# Altium PCB AVR Board 4.0 R1.PcbDoc (part 1 of 2)
Units mil, origin at the board's own origin, x right, y up, seen from the top; angles counter-clockwise.
Board outline 5050 x 3125 mil, 2 copper layers (Top Layer, Bottom Layer); 127 components, 141 nets, 588 pads, 126 vias.
Unrouted connection lines stored in the file: 1.
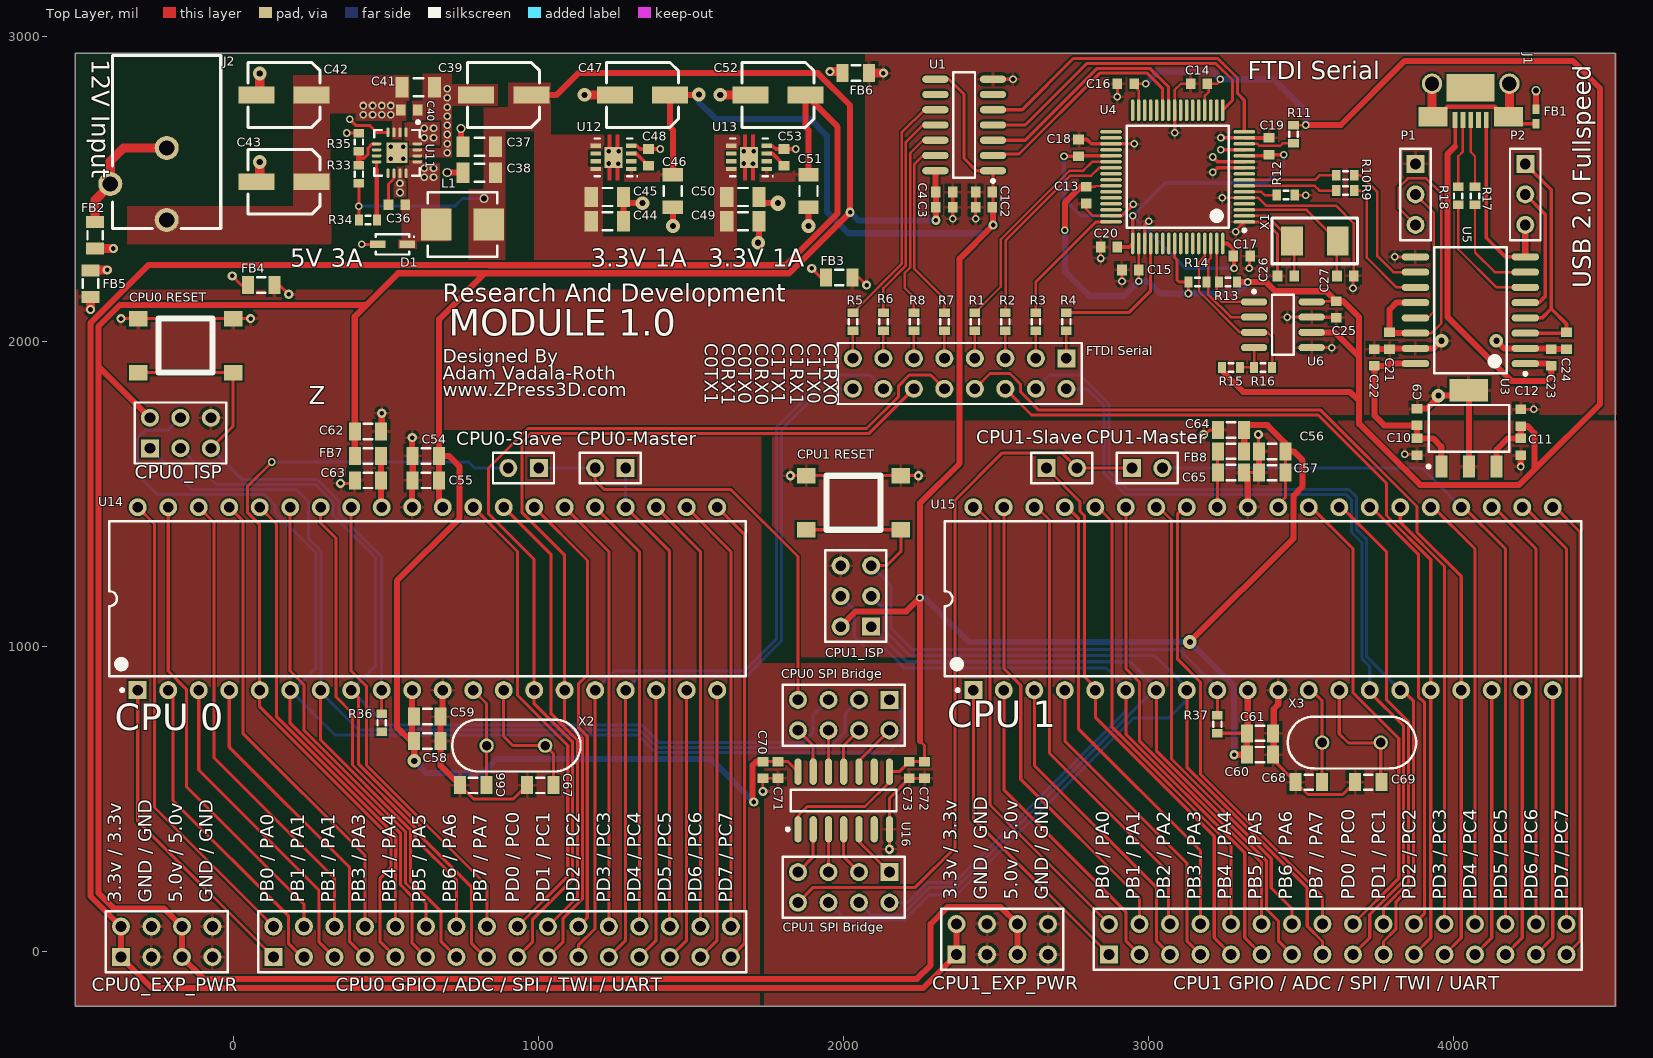
[diagram p0: Top Layer view]
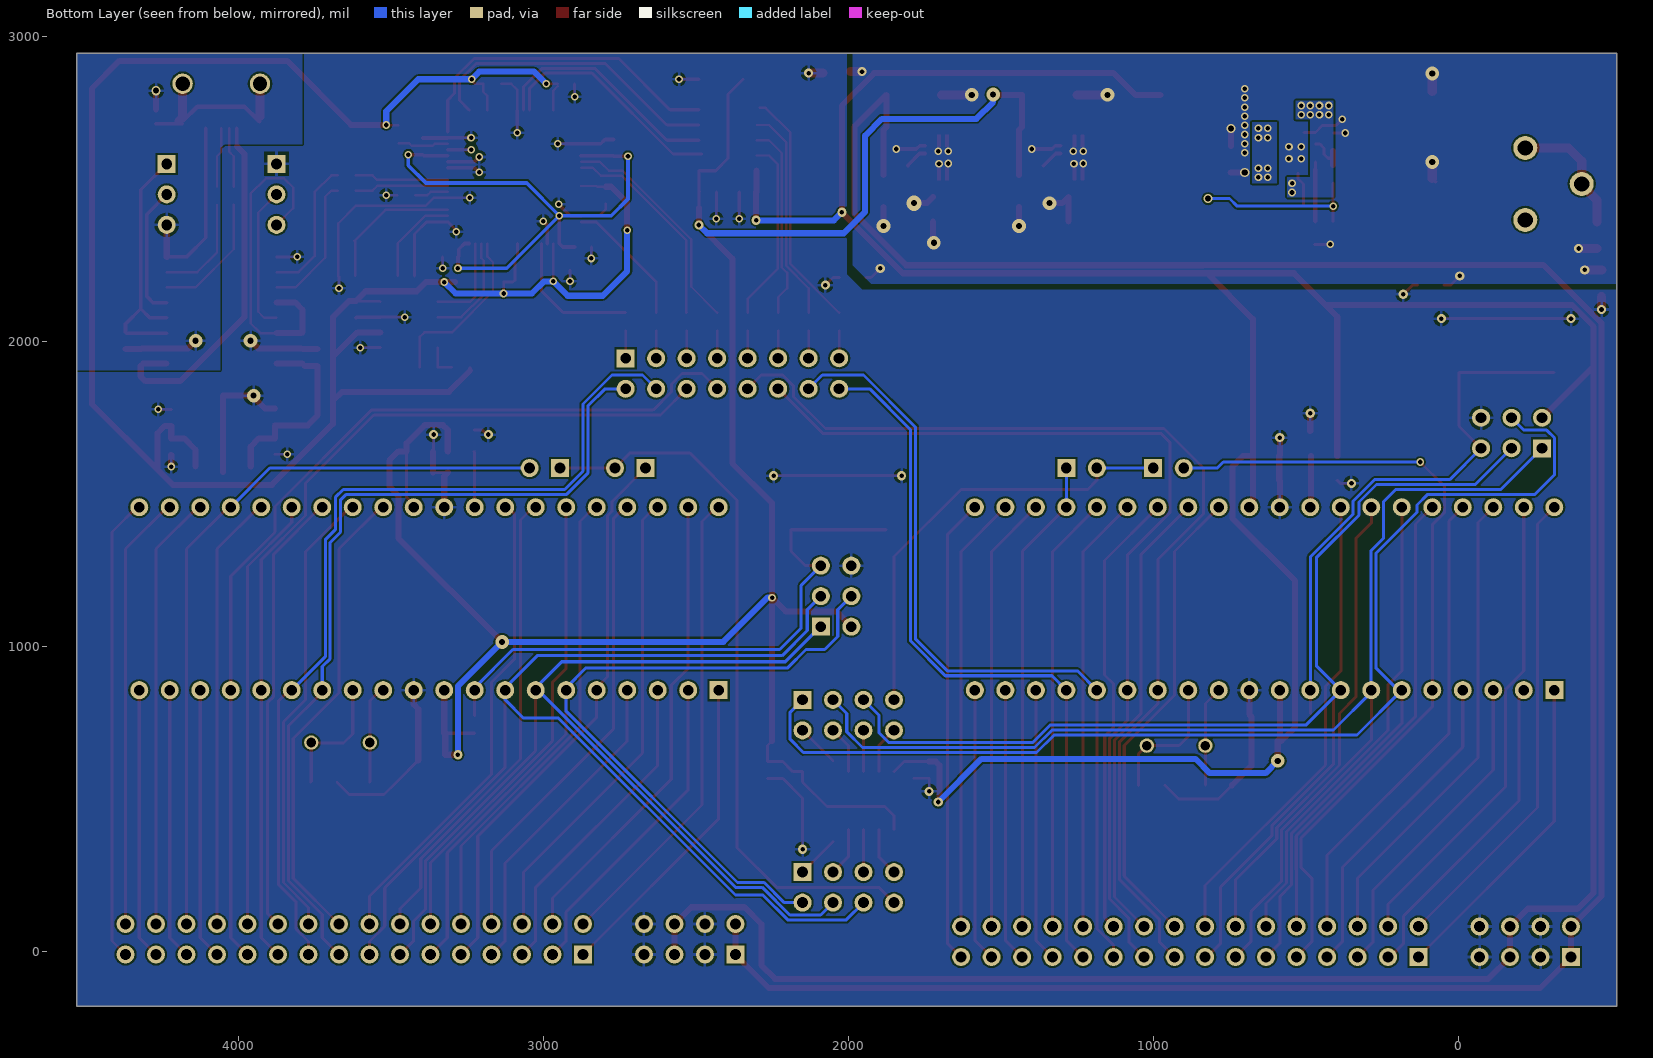
[diagram p1: Bottom Layer view, seen from below]

## Layer stack, top to bottom
Top Layer: signal copper 1.4
Dielectric: dielectric 12.6, FR-4, Dk 4.8
Bottom Layer: signal copper 1.4

## Board outline
-520,-180 -520,2945 4530,2945 4530,-180

## Design rules (kind name [scope] priority, off if disabled: settings)
Clearance [All] p1: gap=6
ComponentClearance [All] p1: gap=0 collisioncheckmode=3 verticalgap=10 showdistances=FALSE
FanoutControl Fanout_SOIC [(InComponent('U8') AND InComponent('U7'))] p3: bgadir=Out bgaviamode=Centered fanoutstyle=Staggered fanoutdirection=Alternating viagrid=1 // Fanout_SOIC (Default Rule)
FanoutControl Fanout_Small [All] p4: bgadir=Out bgaviamode=Centered fanoutstyle=Auto fanoutdirection=Alternating viagrid=1 // Fanout_Small (Default Rule)
HoleSize [All] p1: absolutevalues=TRUE maxlimit=120 minlimit=1 maxpercent=80.000 minpercent=20.000
MinimumSolderMaskSliver [All] p1 off: minsoldermaskwidth=10
MinimumSolderMaskSliver SilkscreenOverComponentPads [All] p2 off: minsoldermaskwidth=10
PlaneConnect [All] p1: planeconnectstyle=Direct reliefexpansion=20 reliefentries=4 reliefconductorwidth=10 reliefairgap=10
PolygonConnect PGND [InNet('PGND')] p1: connectstyle=Direct reliefconductorwidth=10 reliefentries=4 polygonreliefangle="90 Angle" airgapwidth=10
PolygonConnect PolygonConnect_3 [InNet('5VCC')] p2: connectstyle=Direct reliefconductorwidth=10 reliefentries=4 polygonreliefangle="90 Angle" airgapwidth=10
PolygonConnect PolygonConnect_2 [InNet('SW')] p3: connectstyle=Direct reliefconductorwidth=10 reliefentries=4 polygonreliefangle="90 Angle" airgapwidth=10
PolygonConnect PolygonConnect_1 [InNet('VIN')] p4: connectstyle=Direct reliefconductorwidth=10 reliefentries=4 polygonreliefangle="90 Angle" airgapwidth=10
PolygonConnect [All] p5: connectstyle=Relief reliefconductorwidth=10 reliefentries=4 polygonreliefangle="90 Angle" airgapwidth=10
RoutingVias [All] p1: holewidth=15 width=25 viastyle="Through Hole" minholewidth=15 minwidth=25 maxholewidth=28 maxwidth=50
SilkToSilkClearance [All] p1 off: silktosilkclearance=10
SolderMaskExpansion [All] p1: expansion=4
Width [All] p1: maxlimit=30 minlimit=6 preferedwidth=6 minimp=50.000000 maximp=50.000000 favimp=50.000000
21 further rules are at their usual default settings.

## Classes and differential pairs
component class Designator: C1 C2 C3 C4 C9 C10 C11 C12 C13 C14 C15 C16 C17 C18 C19 C20 C21 C22 C23 C24 C25 C26 C27 "CPU 1" "CPU 2" FB1 J1 P1 P2 R1 R2 R3 R4 R5 R6 R7 R8 R9 R10 R11 R12 R13 R14 R15 R16 R17 R18 U1 U3 U4 U5 U6 X1

## Components (designator, comment, footprint, x,y, rotation, side; value= is the part's Value field where it differs from the comment)
C1 "0603" 1608[0603] 2460,2490 r0 top
C2 "0603" 1608[0603] 2460,2440 r0 top
C3 "0603" 1608[0603] 2330,2440 r180 top
C4 "0603" 1608[0603] 2330,2490 r180 top
C9 "0603" 1608[0603] 3880,1752.5 r270 top
C10 "0603" 1608[0603] 3880,1655 r90 top
C11 "0603" 1608[0603] 4220,1655 r90 top
C12 "0603" 1608[0603] 4220,1750 r270 top
C13 "0603" 1608[0603] 2795,2480 r90 top
C14 "0603" 1608[0603] 3165,2845 r0 top
C15 "0603" 1608[0603] 2940,2235 r0 top
C16 "0603" 1608[0603] 2925,2845 r0 top
C17 "0603" 1608[0603] 3305,2280 r180 top
C18 "0603" 1608[0603] 2770,2635 r270 top
C19 "0603" 1608[0603] 3395,2640 r270 top
C20 "0603" 1608[0603] 2870,2310 r0 top
C21 "0603" 1608[0603] 3790,2002.5 r90 top
C22 "0603" 1608[0603] 3740,1947.5 r270 top
C23 "0603" 1608[0603] 4320,1947.5 r270 top
C24 "0603" 1608[0603] 4370,2002.5 r90 top
C25 "0603" 1608[0603] 3615,2105 r90 top
C26 "0603" 1608[0603] 3450,2215 r0 top
C27 "0603" 1608[0603] 3645,2215 r180 top
C36 "Cap Semi" 1608[0603] 535,2448.78 r180 top
C37 "1206" C1206 805,2638.78 r0 top
C38 "Cap Semi" C1206 805,2553.78 r180 top
C39 "VS C" "Panasonic VS C" 765,2693.78 r0 top
C40 "0603" 1608[0603] 575,2758.78 r180 top
C41 "1206" C1206 605,2833.78 r180 top
C42 "VS C" "Panasonic VS C" 45,2693.78 r0 top
C43 "VS C" "Panasonic VS C" 45,2408.78 r0 top
C44 "1206 Tantulum" C1206 1225,2393.78 r0 top
C45 "1206 Tantulum" C1206 1225,2473.78 r180 top
C46 "1206 Tantulum" C1206 1440,2493.78 r270 top
C47 "VS C" "Panasonic VS C" 1220,2693.78 r0 top
C48 "0603" 1608[0603] 1360,2603.78 r270 top
C49 "1206 Tantulum" C1206 1669.45,2393.78 r0 top
C50 "1206 Tantulum" C1206 1669.45,2473.78 r180 top
C51 "1206 Tantulum" C1206 1884.45,2493.78 r270 top
C52 "VS C" "Panasonic VS C" 1664.45,2693.78 r0 top
C53 "0603" 1608[0603] 1804.45,2603.78 r270 top
C54 "0805" "SM 0805 - gap trimmed" 630,1625 r0 top
C55 "0805" "SM 0805 - gap trimmed" 630,1545 r0 top
C56 "0805" "SM 0805 - gap trimmed" 3405,1640 r0 top
C57 "0805" "SM 0805 - gap trimmed" 3405,1570 r0 top
C58 "0805" "SM 0805 - gap trimmed" 635,690 r180 top
C59 "0805" "SM 0805 - gap trimmed" 635,770 r180 top
C60 "0805" "SM 0805 - gap trimmed" 3365,645 r180 top
C61 "0805" "SM 0805 - gap trimmed" 3365,715 r180 top
C62 "0805" "SM 0805 - gap trimmed" 440,1705 r180 top
C63 "0805" "SM 0805 - gap trimmed" 440,1545 r0 top
C64 "0805" "SM 0805 - gap trimmed" 3270,1710 r0 top
C65 "0805" "SM 0805 - gap trimmed" 3270,1570 r180 top
C66 "0805" "SM 0805 - gap trimmed" 785,545 r0 top
C67 "0805" "SM 0805 - gap trimmed" 1005,545 r0 top
C68 "0805" "SM 0805 - gap trimmed" 3525,555 r0 top
C69 "0805" "SM 0805 - gap trimmed" 3720,555 r0 top
C70 "0603" 1608[0603] 1735,595 r90 top
C71 "0603" 1608[0603] 1785,595 r90 top
C72 "0603" 1608[0603] 2265,595 r90 top
C73 "0603" 1608[0603] 2215,595 r90 top
"CPU0 GPIO / ADC / SPI / TWI / UART" "Header 16X2" HDR2X16 130,-18.28 r0 top
"CPU0 RESET" "Tactile Switch" "Mountain Switch TS6324T1607" -30,2075 r270 top
"CPU0 SPI Bridge" "Header 4X2" HDR2X4 2150,825 r180 top (schematic designator "CPU0 SPI Bridge Select")
CPU0-Master "Header 2" HDR1X2 1285,1585 r180 top
CPU0-Slave "Header 2" HDR1X2 1000,1585 r180 top
CPU0_EXP_PWR "Header 4X2" HDR2X4 -370,-18.28 r0 top
CPU0_ISP "Header 3X2" HDR2X3 -275,1650 r0 top
"CPU1 GPIO / ADC / SPI / TWI / UART" "Header 16X2" HDR2X16 2870,-10 r0 top
"CPU1 RESET" "Tactile Switch" "Mountain Switch TS6324T1607" 2160,1560 r270 top
"CPU1 SPI Bridge" "Header 4X2" HDR2X4 2150,260 r180 top (schematic designator "CPU1 SPI Bridge Select")
CPU1-Master "Header 2" HDR1X2 2945,1585 r0 top
CPU1-Slave "Header 2" HDR1X2 2665,1585 r0 top
CPU1_EXP_PWR "Header 4X2" HDR2X4 2370,-10 r0 top
CPU1_ISP "Header 3X2" HDR2X3 2090,1065 r90 top
D1 "PMEG1030EH_EJ" PMEG1030EH_EJ 520,2318.78 r0 top
FB1 "BLM18PG121SN1D" BLM18PG121SN1D 4270,2737.5 r90 top
FB2 "MI0805L301R-10" "SM 0805 - gap trimmed" -455,2348.78 r90 top
FB3 "MI0805L301R-10" "SM 0805 - gap trimmed" 1985,2210 r180 top
FB4 "MI0805L301R-10" "SM 0805 - gap trimmed" 90,2185 r180 top
FB5 "MI0805L301R-10" "SM 0805 - gap trimmed" -470,2190 r90 top
FB6 "MI0805L301R-10" "SM 0805 - gap trimmed" 2040,2880 r180 top
FB7 "Inductor" "SM 0805 - gap trimmed" 440,1625 r0 top
FB8 "Inductor" "SM 0805 - gap trimmed" 3270,1640 r180 top
"FTDI Serial" "Header 8X2" HDR2X8 2730,1945 r180 top
J1 "DX4R005J91R5100" "Micro USB Circular Holes Only" 4055,2885 r180 top
J2 "Center-positive 2.1 mm power jack" PJ-102AH -220,2398.78 r0 top
L1 "Inductor" CIP0530LR3R3 750,2383.78 r0 top
P1 "Header 3" HDR1X3 3875,2582.5 r270 top
P2 "Header 3" HDR1X3 4235,2582.5 r270 top
R1 "0603" J1-0603 2430,2065 r270 top
R2 "0603" J1-0603 2530,2065 r270 top
R3 "0603" J1-0603 2630,2065 r270 top
R4 "0603" J1-0603 2730,2065 r270 top
R5 "0603" J1-0603 2030,2065 r270 top
R6 "0603" J1-0603 2130,2065 r270 top
R7 "0603" J1-0603 2330,2065 r270 top
R8 "0603" J1-0603 2230,2065 r270 top
R9 "0603" J1-0603 3645,2495 r180 top
R10 "0603" J1-0603 3645,2545 r180 top
R11 "0603" J1-0603 3475,2680 r90 top
R12 "0603" J1-0603 3450,2480 r0 top
R13 "0603" J1-0603 3260,2195 r0 top
R14 "0603" J1-0603 3160,2195 r180 top
R15 "0603" J1-0603 3270,1915 r180 top
R16 "0603" J1-0603 3375,1915 r0 top
R17 "0603" J1-0603 4070,2477.5 r270 top
R18 "0603" J1-0603 4015,2477.5 r270 top
R33 "Res3" J1-0603 410,2548.78 r270 top
R34 "Res3" J1-0603 440,2398.78 r0 top
R35 "Res3" J1-0603 410,2653.78 r270 top
R36 "Res3" J1-0603 485,750 r270 top
R37 "Res3" J1-0603 3225,745 r270 top
U1 "TXS0104E" SOIC127P600X175-14N 2395,2710 r180 top
U3 "UA78M05" SOT230P700X180-4N 4050,1715 r90 top
U4 "FT4232HL-Tray" LQFP-64_N 3095,2540 r180 top
U5 "ADuM4160" ADuM4160 4055,2102.5 r180 top
U6 "AT93C46" SOIC127P600X175-8N 3440,2055 r0 top
U11 "MIC24085" MIC24085-AYML 535,2618.78 r270 top
U12 "TPS73733QDRBRQ1" TI-DRB8-1750X1500TP_V 1245,2603.78 r180 top
U13 "TPS73733QDRBRQ1" TI-DRB8-1750X1500TP_V 1689.45,2603.78 r180 top
U14 "ATmega1284-PU" 40P6 635,1156.72 r90 top
U15 "ATmega1284-PU" 40P6 3375,1156.72 r90 top
U16 "TXS0104E" SOIC127P600X175-14N 2000,495 r90 top
X1 "12MHZ" 445C35A12M00000 3470,2330 r0 top
X2 "18.432MHZ" "radial 4.88" 925,675 r0 top
X3 "18.432MHZ" "radial 4.88" 3665,685 r0 top

## Footprints (in the part's own frame and the unit in brackets; to place one, negate y for a bottom-side part, rotate by r counter-clockwise, add the part's x,y. Pads: shape width x height; smd on the part's side, far side on the other; paste and mask are expansions set on the pad)
40P6 [mm] "40-Pin Ceramic Dual In-Line Package (CerDIP)"
  rect 1.5x1.5 hole 0.9: 1(-7.62,24.13)
  round 1.5 hole 0.9: 2(-7.62,21.59) 3(-7.62,19.05) 4(-7.62,16.51) 5(-7.62,13.97) 6(-7.62,11.43) 7(-7.62,8.89) 8(-7.62,6.35) 9(-7.62,3.81) 10(-7.62,1.27) 11(-7.62,-1.27) 12(-7.62,-3.81) 13(-7.62,-6.35) 14(-7.62,-8.89) 15(-7.62,-11.43) 16(-7.62,-13.97) 17(-7.62,-16.51) 18(-7.62,-19.05) 19(-7.62,-21.59) 20(-7.62,-24.13) 21(7.62,-24.13) 22(7.62,-21.59) 23(7.62,-19.05) 24(7.62,-16.51) 25(7.62,-13.97) 26(7.62,-11.43) 27(7.62,-8.89) 28(7.62,-6.35) 29(7.62,-3.81) 30(7.62,-1.27) 31(7.62,1.27) 32(7.62,3.81) 33(7.62,6.35) 34(7.62,8.89) 35(7.62,11.43) 36(7.62,13.97) 37(7.62,16.51) 38(7.62,19.05) 39(7.62,21.59) 40(7.62,24.13)
  silkscreen extent -7.74,-26.5 6.45,26.5, body extent -7.05,-26.47 7.05,26.47, height 4.83
445C35A12M00000 [mm] "Crystal Oscillator"
  rect 1.8x2.4 smd: 1(0,0) 2(3.8,0)
  silkscreen extent -1.65,-1.91 5.46,1.91, body extent -1.27,-1.52 5.08,1.52, height 1
1608[0603] [mm] "Chip Capacitor, Body 1.6x0.8mm, IPC High Density"
  rect 0.8x0.9 smd: 1(-0.7,0) 2(0.7,0)
  body extent -0.87,-0.48 0.87,0.48, height 1.3
ADuM4160 [mm] "SOIC, 16-Leads, Body 10.30x7.50mm, Pitch 1.27mm, IPC Medium Density"
  oval 2.3x0.6 smd: 1(-4.575,4.445) 2(-4.575,3.175) 3(-4.575,1.905) 4(-4.575,0.635) 5(-4.575,-0.635) 6(-4.575,-1.905) 7(-4.575,-3.175) 8(-4.575,-4.445) 9(4.575,-4.445) 10(4.575,-3.175) 11(4.575,-1.905) 12(4.575,-0.635) 13(4.575,0.635) 14(4.575,1.905) 15(4.575,3.175) 16(4.575,4.445)
  silkscreen extent -4.7,-5.25 3.03,5.42, body extent -3.8,-5.25 3.8,5.25, height 2.65
BLM18PG121SN1D [mm] "Chip Inductor, 2-Leads, Body 1.0x0.5mm, IPC Medium Density"
  rect 0.8x0.6 smd: 1(-0.6,0) 2(0.6,0)
  body extent -0.52,-0.28 0.53,0.27, height 0.6
C1206 [mm] "Chip Capacitor, Body 3.2x1.6mm, IPC High Density"
  rect 1.1x1.7 smd: 1(-1.35,0) 2(1.35,0)
  silkscreen extent -0.4,-0.75 0.4,0.75, body extent -1.7,-0.9 1.7,0.9, height 1.3
CIP0530LR3R3 [mm] "Precision Wire Wound Inductor, 2-Leads, Body 5.58x5.30mm, IPC Medium Density"
  rect 2.55x2.7 smd: 1(-2.175,0) 2(2.175,0)
  silkscreen extent -2.9,-2.7 2.9,2.7, body extent -2.88,-2.7 2.88,2.7, height 2.29
HDR1X2 [mm] "Connector; Header; 2 Position"
  rect 1.5x1.5 hole 0.9: 1(0,0)
  round 1.5 hole 0.9: 2(2.54,0)
  silkscreen extent -1.27,-1.27 3.81,1.27
HDR1X3 [mm] "Connector; Header; 3 Position"
  rect 1.5x1.5 hole 0.9: 1(0,0)
  round 1.5 hole 0.9: 2(2.54,0) 3(5.08,0)
  silkscreen extent -1.27,-1.27 6.35,1.27
HDR2X3 [mm] "Connector; Header; 3x2 Position"
  rect 1.5x1.5 hole 0.9: 1(0,0)
  round 1.5 hole 0.9: 2(0,2.54) 3(2.54,0) 4(2.54,2.54) 5(5.08,0) 6(5.08,2.54)
  silkscreen extent -1.27,-1.27 6.35,3.81
HDR2X4 [mm] "Connector; Header; 4x2 Position"
  rect 1.5x1.5 hole 0.9: 1(0,0)
  round 1.5 hole 0.9: 2(0,2.54) 3(2.54,0) 4(2.54,2.54) 5(5.08,0) 6(5.08,2.54) 7(7.62,0) 8(7.62,2.54)
  silkscreen extent -1.27,-1.27 8.89,3.81
HDR2X8 [mm] "Connector; Header; 8x2 Position"
  rect 1.5x1.5 hole 0.9: 1(0,0)
  round 1.5 hole 0.9: 2(0,2.54) 3(2.54,0) 4(2.54,2.54) 5(5.08,0) 6(5.08,2.54) 7(7.62,0) 8(7.62,2.54) 9(10.16,0) 10(10.16,2.54) 11(12.7,0) 12(12.7,2.54) 13(15.24,0) 14(15.24,2.54) 15(17.78,0) 16(17.78,2.54)
  silkscreen extent -1.27,-1.27 19.05,3.81
HDR2X16 [mm] "Connector; Header; 16x2 Position"
  rect 1.5x1.5 hole 0.9: 1(0,0)
  round 1.5 hole 0.9: 2(0,2.54) 3(2.54,0) 4(2.54,2.54) 5(5.08,0) 6(5.08,2.54) 7(7.62,0) 8(7.62,2.54) 9(10.16,0) 10(10.16,2.54) 11(12.7,0) 12(12.7,2.54) 13(15.24,0) 14(15.24,2.54) 15(17.78,0) 16(17.78,2.54) 17(20.32,0) 18(20.32,2.54) 19(22.86,0) 20(22.86,2.54) 21(25.4,0) 22(25.4,2.54) 23(27.94,0) 24(27.94,2.54) 25(30.48,0) 26(30.48,2.54) 27(33.02,0) 28(33.02,2.54) 29(35.56,0) 30(35.56,2.54) 31(38.1,0) 32(38.1,2.54)
  silkscreen extent -1.27,-1.27 39.37,3.81
J1-0603 [mm] "Chip Resistor, Body 1.6x0.8mm, IPC High Density"
  rect 0.7x0.9 smd: 1(-0.75,0) 2(0.75,0)
  silkscreen extent -0.2,-0.35 0.2,0.35, body extent -0.85,-0.48 0.85,0.48, height 0.9
LQFP-64_N [mm] "Thin QFP, 64-Leads, Body 10x10mm, Pitch 0.5mm, IPC Medium Density"
  oval 1.8x0.3 smd: 1(-5.55,3.75) 2(-5.55,3.25) 3(-5.55,2.75) 4(-5.55,2.25) 5(-5.55,1.75) 6(-5.55,1.25) 7(-5.55,0.75) 8(-5.55,0.25) 9(-5.55,-0.25) 10(-5.55,-0.75) 11(-5.55,-1.25) 12(-5.55,-1.75) 13(-5.55,-2.25) 14(-5.55,-2.75) 15(-5.55,-3.25) 16(-5.55,-3.75) 33(5.55,-3.75) 34(5.55,-3.25) 35(5.55,-2.75) 36(5.55,-2.25) 37(5.55,-1.75) 38(5.55,-1.25) 39(5.55,-0.75) 40(5.55,-0.25) 41(5.55,0.25) 42(5.55,0.75) 43(5.55,1.25) 44(5.55,1.75) 45(5.55,2.25) 46(5.55,2.75) 47(5.55,3.25) 48(5.55,3.75)
  oval 0.3x1.8 smd: 17(-3.75,-5.55) 18(-3.25,-5.55) 19(-2.75,-5.55) 20(-2.25,-5.55) 21(-1.75,-5.55) 22(-1.25,-5.55) 23(-0.75,-5.55) 24(-0.25,-5.55) 25(0.25,-5.55) 26(0.75,-5.55) 27(1.25,-5.55) 28(1.75,-5.55) 29(2.25,-5.55) 30(2.75,-5.55) 31(3.25,-5.55) 32(3.75,-5.55) 49(3.75,5.55) 50(3.25,5.55) 51(2.75,5.55) 52(2.25,5.55) 53(1.75,5.55) 54(1.25,5.55) 55(0.75,5.55) 56(0.25,5.55) 57(-0.25,5.55) 58(-0.75,5.55) 59(-1.25,5.55) 60(-1.75,5.55) 61(-2.25,5.55) 62(-2.75,5.55) 63(-3.25,5.55) 64(-3.75,5.55)
  silkscreen extent -5.68,-4.25 4.25,4.57, body extent -5,-5 5,5, height 1.6
MIC24085-AYML [mm] "QFN, 16-Leads, Body 3.25x3.25mm, Pitch 0.50mm, Thermal Pad 1.73x1.73mm, IPC Medium Density"
  oval 0.8x0.25 smd: 1(-1.7,0.75) 2(-1.7,0.25) 3(-1.7,-0.25) 4(-1.7,-0.75) 9(1.7,-0.75) 10(1.7,-0.25) 11(1.7,0.25) 12(1.7,0.75)
  oval 0.25x0.8 smd: 5(-0.75,-1.7) 6(-0.25,-1.7) 7(0.25,-1.7) 8(0.75,-1.7) 13(0.75,1.7) 14(0.25,1.7) 15(-0.25,1.7) 16(-0.75,1.7)
  rect 1.73x1.73 smd: 17(0,0)
  silkscreen extent -2.67,-1.9 1.9,1.9, body extent -1.75,-1.75 1.75,1.75, height 0.85
"Micro USB Circular Holes Only" [mm]
  rect 0.4x1.35 smd: 1(1.275,4.025) 2(0.625,4.025) 3(-0.025,4.025) 4(-0.675,4.025) 5(-1.325,4.025)
  rect 2.4x1.6 smd: 6(3.125,3.75) 9(-3.175,3.75)
  round 1.7 hole 1.2: 7(3.2,1) 8(-3.25,1)
  rect 4x2.3 smd: GND(-0.025,1.35)
  body extent -4.1,-1.64 4.1,3.79, height 2.73
"Mountain Switch TS6324T1607" [mm]
  rect 1.3x1.55 smd: 1(0,0.7) 1(0,-7.2) 2(4.5,0.7) 2(4.5,-7.2)
  silkscreen extent 0,-5.5 4.5,-1
"Panasonic VS C" [mm]
  rect 3x1.4 smd: 1(5.348,2.921) 2(0.748,2.921)
  silkscreen extent 0.05,0.22 6.05,5.62
PJ-102AH [mm] "Center positive 2.1 mm power jack"
  round 2 hole 1.27: 1(0,0) 2(0,6) 3(-4.7,3)
  silkscreen extent -4.5,-0.7 4.5,13.7, body extent -5.8,-0.7 4.5,13.7, height 11
PMEG1030EH_EJ [mm] "Molded Diode, 2-Leads, Body 2.60x1.60mm, IPC Medium Density"
  rect 1.3x0.65 smd: 1(-1.225,0) 2(1.225,0)
  silkscreen extent -1.4,-0.85 1.85,0.85, body extent -1.35,-0.85 1.35,0.85, height 1.2
"radial 4.88" [mm]
  round 1.2 hole 0.8: 1(-2.44,0) 2(2.44,0)
  silkscreen extent -5.3,-2.16 5.38,2.16
"SM 0805 - gap trimmed" [mm]
  rect 1x1.5 smd: 1(-1.1,0) 2(1.1,0)
  silkscreen extent -0.36,-0.64 0.35,0.63
SOIC127P600X175-8N [mm] "SOIC, 8-Leads, Body 4.90x3.90mm, Pitch 1.27mm, IPC Medium Density"
  oval 2.2x0.6 smd: 1(-2.4,1.905) 2(-2.4,0.635) 3(-2.4,-0.635) 4(-2.4,-1.905) 5(2.4,-1.905) 6(2.4,-0.635) 7(2.4,0.635) 8(2.4,1.905)
  silkscreen extent -2.52,-2.5 0.9,2.88, body extent -2,-2.5 2,2.5, height 1.75
SOIC127P600X175-14N [mm] "SOIC, 14-Leads, Body 8.65x3.90mm, Pitch 1.27mm, IPC Medium Density"
  oval 2.2x0.6 smd: 1(-2.4,3.81) 2(-2.4,2.54) 3(-2.4,1.27) 4(-2.4,0) 5(-2.4,-1.27) 6(-2.4,-2.54) 7(-2.4,-3.81) 8(2.4,-3.81) 9(2.4,-2.54) 10(2.4,-1.27) 11(2.4,0) 12(2.4,1.27) 13(2.4,2.54) 14(2.4,3.81)
  silkscreen extent -2.53,-4.4 0.9,4.78, body extent -2,-4.4 2,4.4, height 1.75
SOT230P700X180-4N [mm] "SOT223, 4-Leads, Body 6.50x7.00mm (avg), Pitch 2.30mm, IPC Medium Density"
  rect 1.85x1 smd: 1(-3.175,2.3) 2(-3.175,0) 3(-3.175,-2.3)
  rect 1.85x3.2 smd: 4(3.175,0)
  silkscreen extent -3.3,-3.35 1.95,3.47, body extent -1.85,-3.35 1.85,3.35, height 1.8
TI-DRB8-1750X1500TP_V [mm] "SON, 8-Leads, Body 3x3mm, Pitch 0.65mm, Thermal Pad 1.50 x 3.8mm"
  rect 0.85x0.35 smd: 1(-1.475,0.975) 2(-1.475,0.325) 3(-1.475,-0.325) 4(-1.475,-0.975) 5(1.475,-0.975) 6(1.475,-0.325) 7(1.475,0.325) 8(1.475,0.975)
  rect 1.5x1.75 smd: 9(0,0)
  Top Layer region: -0.185,0.875 -0.185,1.9 -0.465,1.9 -0.465,0.875
  Top Layer region: 0.185,-0.875 0.185,-1.9 0.465,-1.9 0.465,-0.875
  Top Layer region: -0.185,-0.875 -0.185,-1.9 -0.465,-1.9 -0.465,-0.875
  Top Layer region: 0.185,0.875 0.185,1.9 0.465,1.9 0.465,0.875
  silkscreen extent -2.02,-1.58 1.57,1.62, body extent -1.5,-1.5 1.5,1.5, height 1

## Part data
C1 C2 C3 C4 C9 C10 C11 C12 C13 C14 C15 C16 C17 C18 C19 C20 C21 C22 C23 C24 C25 C26 C27 C37 C39 C40 C41 C44 C45 C46 C47 C48 C49 C50 C51 C52 C53 C54 C55 C56 C57 C58 C59 C60 C61 C62 C63 C64 C65 C66 C67 C68 C69 C70 C71 C72 C73: library part "Cap Semi", "Capacitor (Semiconductor SIM Model)"
C36 C38: "Capacitor (Semiconductor SIM Model)"
C42 C43: library part "Cap Pol3", "Polarized Capacitor (Surface Mount)"
"CPU0 GPIO / ADC / SPI / TWI / UART" "CPU1 GPIO / ADC / SPI / TWI / UART": "Header, 16-Pin, Dual row"
"CPU0 SPI Bridge" CPU0_EXP_PWR "CPU1 SPI Bridge" CPU1_EXP_PWR: "Header, 4-Pin, Dual row"
CPU0-Master CPU0-Slave CPU1-Master CPU1-Slave: "Header, 2-Pin"
CPU0_ISP CPU1_ISP: "Header, 3-Pin, Dual row"
D1: library part Diode, "Default Diode"
FB2 FB3 FB4 FB5 FB6: library part Inductor, "Inductor"
"FTDI Serial": "Header, 8-Pin, Dual row"
J1: library part "Micro USB", "Micro USB Jack B"
J2: library part PWR2.5, "Power jack"
P1 P2: "Header, 3-Pin"
R1 R2 R3 R4 R5 R6 R7 R8 R9 R10 R11 R12 R13 R14 R15 R16 R17 R18: library part Res3, "Resistor"
R33 R34 R35 R36 R37: "Resistor"
U4: "Quad High Speed USB To Multipurpose UART/MPSSE IC, 64-pin LQFP, Tray"
U5: "USB Opto Isolator"
U12 U13: "Single Output Automotive LDO, 1 A, Fixed 3.3 V Output, 2.2 to 5.5 V Input, with Reverse Current Protection, 8-pin SON (DRB), -40 to 125 degC, Green (RoHS & no Sb/Br)"
U14 U15: "8-bit AVR Microcontroller, 128KB Flash, 4KB EEPROM, 16KB SRAM, 40-pin PDIP, Industrial Grade (-40°C to 85°C)"
X1 X2 X3: library part XTAL, "Crystal Oscillator"

## Via types
v1: diameter 25, hole 15, Top Layer to Bottom Layer, 82 vias
v2: diameter 30, hole 15, Top Layer to Bottom Layer, 25 vias
v3: diameter 45, hole 20, Top Layer to Bottom Layer, 14 vias
v4: diameter 30, hole 20, Top Layer to Bottom Layer, 4 vias
v5: diameter 50, hole 20, Top Layer to Bottom Layer, 1 vias

## Nets (pads, with @x,y where several pads share a name; then routed paths per layer and width w, separated by ;. In a path a pad name is that pad's centre, name@x,y a point inside that pad or via, vN(x,y) a via of type N, cw(c..) or ccw(c..) an arc to the next point about the centre after c; other vN are vias at no path point)
3.3VCC: C1.2 C2.2 C46.1 C47.1 C56.2 C57.2 C60.2 C61.2 C64.2 C72.2 C73.2 CPU1_ISP.2 FB8.1 R37.2 U1.1 U1.8 U12.1 U15.10 U15.30 U16.1 U16.8 | length 7970.7
  Top Layer w10: U16.1@1850,400.51 1850,445 1880,475 2070,475 2150,555 U16.8@2150,589.49 2181.93,589.49 C73.2@2215,622.56 C72.2@2265,622.56 2265,675 2250,690 ; 2345,2860 2395,2810 2395,2600 2435,2560 U1.1@2489.49,2560 2489.49,2491.93 C1.2@2487.56,2490 ; C2.2@2487.56,2440 C2.2@2490,2437.56 ; C2.2@2489.49,2441.93 C1.2@2489.49,2490 ; R37.2@3225,715.47 C61.2@3321.22,715.47 ; U15.30@3425,1465 3448.31,1488.31 C57.2@3448.31,1570 C56.2@3448.31,1640
  Top Layer w20: C46.1@1440,2546.93 1440,2693.78 1430.55,2703.23 C47.1@1430.55,2808.78 v3@1523.78,2808.78 ; CPU1_ISP.2@1990,1065 2040,1115 2205,1115 v1(2250,1160) ; 2250,690 v1(2250,1160) ; C2.2@2490,2437.56 v2(2490,2382.03) 2380,2272.03 2380,1600 2250,1470 v1(2250,1160) ; v3(3135,1015) 3475,1355 3475,1495 3505,1525 3505,1610 3475,1640 C56.2@3448.31,1640 3448.31,1666.69 3389,1726 3329.31,1726 C64.2@3313.31,1710 FB8.1@3313.31,1640 ; v2(3280,645) C60.2@3321.69,645 C61.2@3321.69,715 C61.2@3321.22,715.47 ; C61.2@3325,715 U15.10@3325,856.72 U15.10@3325,865
  Bottom Layer w20: v3(1525,2810) 1525,2785 1580,2730 1890,2730 1945,2675 1945,2425 2015,2355 2462.97,2355 v2(2490,2382.03) ; v1(2250,1160) 2265,1160 2410,1015 v3(3135,1015) 3280,870 v2(3280,645)
3.3VCC_2: C11.2 C12.2 C13.2 C14.2 C15.2 C16.2 C25.2 R11.2 R13.2 R14.2 R15.2 U3.3 U4.20 U4.31 U4.42 U4.50 U4.56 U6.6 U6.8 | length 7392.2
  Top Layer w8: C13.2@2795,2507.56 2822.56,2507.56 2825,2510 2876.02,2510 U4.42@2876.5,2510.47 ; C16.2@2952.56,2837.44 2967.05,2822.95 U4.31@2967.05,2758.5 ; C16.2@2952.56,2845 v1(2990,2845) ; U4.50@2967.05,2321.5 2967.05,2235.51 C15.2@2967.56,2235 v1(2967.56,2197.44) ; v1(3130.47,2157.44) R14.2@3130.47,2195 ; U4.20@3183.58,2758.5 3183.58,2805.05 3197.44,2818.91 3197.44,2845 3225,2845 3235,2855 v1(3235,2860) ; R11.2@3475,2709.53 3514.53,2709.53 v1(3515,2710) ; U6.8@3534.49,2130 3537.05,2132.56 C25.2@3615,2132.56
  Top Layer w10: U4.56@3085.16,2321.5 3085.16,2274.84 3092.56,2267.44 3092.56,2202.44 3100,2195 R14.2@3130.47,2195 ; R15.2@3240.47,1904.53 R15.2@3240.47,1915
  Top Layer w20: v1(2725,2365) 2725,2455 2777.56,2507.56 C13.2@2795,2507.56 ; R15.2@3240.47,1904.53 3310,1835 3660,1835 3690,1805 ; R13.2@3289.53,2195 v1(3325,2195) 3385,2195 3415,2165 3582.56,2165 C25.2@3615,2132.56 3637.44,2132.56 3690,2080 3690,1805 ; v1(3515,2710) 3630,2710 3840,2920 4390,2920 4480,2830 4480,1795 4265,1580 ; U6.6@3534.49,2030 3610,2030 3690,1950 ; U3.3@4140.55,1590 4140.55,1645.55 4177.56,1682.56 C11.2@4220,1682.56 C12.2@4220,1722.44 4242.56,1722.44 4265,1700 4265,1580 ; 3690,1805 3690,1730 3890,1530 4215,1530 4265,1580
  Bottom Layer w20: v1(2725,2365) 2725,2230 2805,2150 2920.12,2150 v1(2967.56,2197.44) 2997.56,2197.44 3037.56,2157.44 v1(3130.47,2157.44) 3287.44,2157.44 v1(3325,2195) ; v1(2990,2845) 3030,2885 3210,2885 v1(3235,2860) 3410,2860 3515,2755 v1(3515,2710)
3.3VCC_3: C51.1 C52.1 CPU0_EXP_PWR.1 CPU0_EXP_PWR.2 CPU1_EXP_PWR.1 CPU1_EXP_PWR.2 U13.1 | length 8345.5
  Top Layer w20: C51.1@1884.45,2546.93 1884.45,2693.78 1875,2703.23 C52.1@1875,2808.78 1980,2703.78 1980,2419.88 1810.12,2250 836.77,2250 835.77,2251 -279,2251 -470,2060 -470,181.72 CPU0_EXP_PWR.2@-370,81.72 CPU0_EXP_PWR.1@-370,-18.28 -268.28,-120 2260,-120 CPU1_EXP_PWR.1@2370,-10 CPU1_EXP_PWR.2@2370,90
5VCC: C3.2 C4.2 C37.2 C38.1 C39.1 C44.1 C45.2 C49.1 C50.2 C54.2 C55.2 C58.2 C59.2 C62.2 C70.2 C71.2 CPU0_EXP_PWR.5 CPU0_EXP_PWR.6 CPU0_ISP.2 CPU1_EXP_PWR.5 CPU1_EXP_PWR.6 FB7.1 L1.2 R33.2 R34.1 R36.2 U1.14 U12.5 U12.8 U13.5 U13.8 U14.10 U14.30 U16.14 | length 14848.9
  Top Layer w10: R34.1@410,2394.25 v1(410,2443.78) R33.2@410,2519.25 ; C70.2@1735,622.56 C71.2@1785,622.56 1816.93,622.56 U16.14@1850,589.49
  Top Layer w20: CPU0_ISP.2@-275,1750 -444,1919 ; FB7.1@396.69,1625 C62.2@396.69,1705 396.69,2081.69 539,2224 1820.89,2224 v2(2021,2424.11) 2021,2774 1915,2880 1130,2880 1058.78,2808.78 C39.1@975.55,2808.78 ; 435,2120 -373.23,2120 -444,2049.23 -444,1919 ; U14.10@585,856.72 585,696.69 C58.2@591.69,690 ; v3(591.69,625) C58.2@591.69,690 ; U14.30@685,1456.72 673.31,1468.41 C55.2@673.31,1545 C54.2@673.31,1625 ; 825,2225 673.31,2073.31 C54.2@673.31,1625 ; v2(1705,490) 1701.28,493.72 1701.28,611.28 1712.56,622.56 C70.2@1735,622.56 ; C4.2@2300.51,2490 U1.14@2300.51,2560 ; v2(2302.44,2397.44) C3.2@2302.44,2440 C4.2@2302.44,2490 ; CPU1_EXP_PWR.5@2570,-10 CPU1_EXP_PWR.6@2570,90 2515,145 2340,145 2285,90 2285,-45 2240,-90 -98.28,-90 CPU0_EXP_PWR.5@-170,-18.28 CPU0_EXP_PWR.6@-170,81.72 -228.28,140 -391.51,140 -444,192.49 -444,1919 ; C58.2@591.69,690 580,690 535,735 535,1215 739.47,1419.47 739.47,1590.53 705,1625 C54.2@673.31,1625
  Bottom Layer w10: v1(410,2443.78) 725,2443.78 750,2468.78 v4(820,2468.78)
  Bottom Layer w20: v3(591.69,625) 631.69,585 815,585 861.47,631.47 1563.53,631.47 v2(1705,490) ; v2(2021,2424.11) 2047.67,2397.44 v2(2302.44,2397.44)
BST: C36.2 U11.10 | length 110.4
  Top Layer w10: C36.2@507.44,2448.78 507.44,2516.22 525.16,2533.94 U11.10@525.16,2551.85
CC_SS0: "CPU0 GPIO / ADC / SPI / TWI / UART.9" CPU0-Slave.2 U14.5 | length 2670
  Top Layer w10: v1(125,1605) 44.47,1524.47 44.47,1439.93 85,1399.4 U14.5@85,856.72 85,802.63 515,372.63 515,274.49 480,239.49 480,31.72 530,-18.28
  Bottom Layer w10: v1(125,1605) 770,1605 790,1585 CPU0-Slave.2@900,1585
CPU0_RESET: "CPU0 RESET.2" CPU0_ISP.5 R36.1 U14.9 | length 1852.4
  Top Layer w10: -313.46,1897.83 -2.44,1897.83 -2.44,1722.56 CPU0_ISP.5@-75,1650 ; R36.1@485,779.53 U14.9@485,856.72
  Bottom Layer w10: CPU0_ISP.5@-75,1650 28,1547 274.66,1547 344.47,1477.19 344.47,1434.21 485,1293.68 485,868.43 473.28,856.72 U14.9@485,856.72
CPU1_RESET: "CPU1 RESET.2" CPU1_ISP.5 R37.1 U15.9 | length 1971.7
  Top Layer w10: 1876.54,1382.83 2187.56,1382.83 2187.56,1312.56 2140,1265 CPU1_ISP.5@2090,1265 ; R37.1@3225,774.53 U15.9@3225,865
  Bottom Layer w10: CPU1_ISP.5@2090,1265 2154.53,1200.47 2154.53,1060.47 2225,990 3100,990 U15.9@3225,865
FB: R33.1 R35.2 U11.5 | length 134.9
  Top Layer w10: 410,2601.04 427.26,2601.04 440,2613.78 440,2633.89 454.41,2648.31 U11.5@468.07,2648.31
  Top Layer w20: R33.1@410,2578.31 R35.2@410,2623.78
GND: "CPU0 RESET.1" "CPU1 RESET.1" C1.1 C2.1 C3.1 C4.1 C9.1 C10.1 C11.1 C12.1 C13.1 C14.1 C15.1 C16.1 C17.1 C18.1 C19.1 C20.1 C21.1 C22.1 C25.1 C26.1 C27.1 C54.1 C55.1 C56.1 C57.1 C58.1 C59.1 C60.1 C61.1 C62.1 C63.1 C64.1 C65.1 C66.1 C67.1 C68.1 C69.1 C70.1 C71.1 C72.1 C73.1 CPU0_EXP_PWR.3 CPU0_EXP_PWR.4 CPU0_EXP_PWR.7 CPU0_EXP_PWR.8 CPU0_ISP.6 CPU1_EXP_PWR.3 CPU1_EXP_PWR.4 CPU1_EXP_PWR.7 CPU1_EXP_PWR.8 CPU1_ISP.6 FB3.1 FB4.1 FB5.1 FB6.1 P1.1 R12.2 U1.7 U3.2 U3.4 U4.1 U4.5 U4.10 U4.11 U4.13 U4.15 U4.25 U4.35 U4.47 U4.51 U5.9 U5.15 U6.5 U6.7 U14.11 U14.31 U15.11 U15.31 U16.7 | length 6921.3
  Top Layer w8: C62.1@483.31,1705 C62.1@485,1706.69 ; C54.1@585,1626.69 C54.1@586.69,1625 ; v2(1735,525) C70.1@1735,567.44 C71.1@1785,567.44 ; C13.1@2795,2452.44 2795,2435 2817.95,2412.05 U4.47@2876.5,2412.05 ; U4.25@3085.16,2758.5 3085.16,2825.16 3105,2845 C14.1@3137.44,2845 ; v1(3241.1,2471.1) U4.5@3313.5,2471.1 3359.63,2471.1 3385,2445.73 3614.27,2445.73 3672.56,2387.44 C27.1@3672.56,2215 ; U4.15@3313.5,2667.95 U4.15@3313.9,2667.56 ; R12.2@3479.53,2480 v1(3515,2480) ; v1@3842.44,1630 C10.1@3880,1630
  Top Layer w10: v2(-370,2075) -313.46,2075 -2.44,2075 v2(55,2075) ; FB4.1@133.31,2185 150,2185 v2(180,2155) ; v2(350,1535) 386.69,1535 C63.1@396.69,1545 ; C55.1@585,1543.31 C55.1@586.69,1545 ; C66.1@741.69,545 786.69,500 916.69,500 C67.1@961.69,545 ; v2(1825,1560) 1876.54,1560 2187.56,1560 v2(2245,1560) ; FB3.1@2028.31,2210 2050,2210 v2(2075,2185) ; v2(2150,335) U16.7@2150,400.51 2150,502.44 C73.1@2215,567.44 C72.1@2265,567.44 ; v1(2357.56,2402.44) C3.1@2357.56,2440 C4.1@2357.56,2490 ; v1(2432.44,2402.44) C2.1@2432.44,2440 C1.1@2432.44,2490 ; U1.7@2489.49,2860 v1(2555,2860) ; v1(2842.44,2272.44) C20.1@2842.44,2310 ; v1(2897.44,2802.56) C16.1@2897.44,2845 ; v1(2912.44,2197.44) C15.1@2912.44,2235 ; v2(3180,1695) 3185,1695 3200,1710 C64.1@3226.69,1710 ; v1(3285,2360) 3285,2363.86 U4.1@3313.5,2392.36 3382.64,2392.36 3422.44,2352.56 C26.1@3422.44,2215 ; C65.1@3313.31,1570 C57.1@3361.69,1570 ; v1(3330,2240) C17.1@3330,2277.44 ; v2(3360,1695) 3360,1641.69 C56.1@3361.69,1640 ; C60.1@3410,626.69 C68.1@3481.69,555 3522.22,514.47 3636.17,514.47 C69.1@3676.69,555 ; v1(3455,2080) U6.7@3534.49,2080 ; U6.5@3534.49,1980 v1(3600,1980) ; v1(3670,2175) 3670,2212.44 C27.1@3672.56,2215 ; v1(3807.5,2277.5) U5.9@3874.88,2277.5 ; C12.1@4220,1777.56 v1(4262.56,1777.56)
  Top Layer w12: C18.1@2770,2662.56 2797.44,2662.56 2811.73,2648.27 U4.35@2876.5,2648.27 v1(2953.27,2648.27) ; U4.47@2876.5,2412.05 2912.05,2412.05 v1(2950,2450) ; U4.51@2986.73,2321.5 2986.73,2381.73 v1(3000,2395) ; v1@3085.16,2685.16 U4.25@3085.16,2758.5 ; v1(3210,2554.53) 3225.47,2570 3265,2570 3265.47,2569.53 U4.10@3313.5,2569.53 ; v1(3210,2605) 3225.79,2589.21 U4.11@3313.5,2589.21 ; v1(3236.65,2628.98) U4.13@3313.11,2628.98 ; v1(3237.05,2667.95) U4.15@3313.5,2667.95 ; U4.15@3313.9,2667.56 C19.1@3395,2667.56 ; U6.7@3534.49,2080 3612.44,2080 C25.1@3615,2077.44
  Top Layer w20: C62.1@485,1706.69 v2(485,1765) ; U14.31@585,1456.72 C55.1@585,1543.31 ; C54.1@585,1626.69 v2(585,1685) ; C55.1@586.69,1545 C54.1@586.69,1625 ; U14.11@685,856.72 685,776.69 C59.1@678.31,770 C58.1@678.31,690 678.31,608.39 C66.1@741.69,545 ; C65.1@3313.31,1570 3325,1558.31 U15.31@3325,1465 ; C57.1@3361.69,1570 C56.1@3361.69,1640 ; C60.1@3410,626.69 3410,795 3425,810 U15.11@3425,865 ; C22.1@3740.12,1974.94 C21.1@3790,1974.94 3792.56,1977.5 U5.15@3874.88,1977.5 3935,1977.5 v3(3960,2002.5) ; C9.1@3880,1780.06 3912.56,1780.06 3955,1822.5 4050,1822.5 U3.2@4050,1572.5 ; v1(4220,1590) C11.1@4220,1627.44
  Top Layer w30: v2(-470,2105) FB5.1@-470,2146.69 ; FB6.1@2083.31,2880 v2(2130,2880)
  other v1: 3840,1630 3085,2685
  other v3: 3950,1822.5
IGND: C23.1 C24.1 FB1.2 J1.5 P2.3 U5.2 U5.8 | length 920.5
  Top Layer w12: 4107.17,2699.04 4107.17,2340.33 4170,2277.5 U5.8@4235.12,2277.5
  Top Layer w20: v3(4140,2002.5) 4165,1977.5 U5.2@4235.12,1977.5 4317.44,1977.5 4320,1974.94 C24.1@4370,1974.94 ; P2.3@4235,2382.5 4235,2277.62 U5.8@4235.12,2277.5 ; FB1.2@4270,2761.12 v4(4270,2822.5)
MISO_0: "CPU0 GPIO / ADC / SPI / TWI / UART.13" "CPU0 SPI Bridge.3" CPU0_ISP.1 U14.7 | length 4234.4
  Top Layer w10: U14.7@285,856.72 285,693.14 579,399.14 579,231 680,130 680,31.72 730,-18.28
  Bottom Layer w10: CPU0_ISP.1@-275,1650 -140,1515 205,1515 244.47,1475.53 244.47,1355.53 286,1314 286,857.72 U14.7@285,856.72 285,850 409,726 1331.63,726 1389.16,668.47 1953.47,668.47 2005,720 2005,780 2050,825
MISO_1: "CPU1 GPIO / ADC / SPI / TWI / UART.13" "CPU1 SPI Bridge.4" CPU1_ISP.1 U15.7 | length 3377.8
  Top Layer w10: U15.7@3025,865 3025,658.39 3386,297.39 3386,139 3425,100 3425,35 3470,-10
  Bottom Layer w10: 2050,160 2090.53,119.47 2191.84,119.47 2282.37,210 2370,210 3025,865 2940,950 2206.72,950 2091.72,1065 CPU1_ISP.1@2090,1065
MOSI_0: "CPU0 GPIO / ADC / SPI / TWI / UART.11" "CPU0 SPI Bridge.1" CPU0_ISP.4 U14.6 | length 4799.3
  Top Layer w10: U14.6@185,856.72 185,747.88 547,385.88 547,217.75 585,179.75 585,26.72 630,-18.28
  Bottom Layer w10: CPU0_ISP.4@-175,1750 -215.53,1709.47 -290.14,1709.47 -315.53,1684.08 -315.53,1562.9 -251.63,1499 100.03,1499 135,1464.03 135,1440 270,1305 270,930 196.72,856.72 U14.6@185,856.72 331.72,710 1325,710 1382.53,652.47 2147.47,652.47 2190.53,695.53 2190.53,784.47 2150,825
MOSI_1: "CPU1 GPIO / ADC / SPI / TWI / UART.11" "CPU1 SPI Bridge.2" CPU1_ISP.4 U15.6 | length 3282.2
  Top Layer w10: U15.6@2925,865 2925,713.14 3315,323.14 3315,45 3370,-10
  Bottom Layer w10: CPU1_ISP.4@1990,1165 2034.53,1120.47 2034.53,1032.97 2077.5,990 2138.43,990 2198.43,930 2860,930 2925,865 2925,787.63 2363.37,226 2275.75,226 2209.75,160 2150,160
NetC9_2: C9.2 C10.2 C22.2 U3.1 U5.16 | length 652.5
  Top Layer w20: U5.16@3874.88,1927.5 3790,1927.5 3782.44,1919.94 C22.2@3740,1919.94 3740,1757.5 3772.44,1725.06 3879.88,1725.06 C9.2@3880,1724.94 C10.2@3880,1682.56 3932.44,1682.56 3959.45,1655.55 U3.1@3959.45,1590
NetC17_2: C17.2 C18.2 C19.2 C20.2 U4.12 U4.37 U4.49 U4.64 | length 1926.9
  Top Layer w12: v1(2722.44,2607.44) C18.2@2770,2607.44 ; C18.2@2770,2608.9 U4.37@2876.5,2608.9 ; C20.2@2897.56,2310 2936.14,2310 U4.49@2947.64,2321.5 ; U4.49@2947.36,2321.5 v1(2947.36,2412.64) ; U4.64@3242.64,2321.5 3258.5,2321.5 3277.44,2302.56 C17.2@3277.44,2280 3280,2277.44 v1(3280,2240) ; U4.12@3313.5,2608.9 3391.46,2608.9 C19.2@3395,2612.44 v1(3442.56,2612.44)
  Bottom Layer w12: v1(2722.44,2607.44) 2722.44,2467.56 2777.36,2412.64 v1(2947.36,2412.64) ; v1(3280,2240) 3120,2240 v1(2947.36,2412.64) ; v1(3442.56,2612.44) 3442.56,2577.56 3385,2520 3054.72,2520 v1(2947.36,2412.64)
NetC21_2: C21.2 P1.3 U5.12 U5.14 | length 1097.1
  Top Layer w8: U5.14@3874.88,2027.5 3927.5,2027.5 3960,2060 3960,2485 3910,2535 3850,2535 3820,2505 3820,2437.5 P1.3@3875,2382.5
  Top Layer w20: U5.14@3874.88,2027.5 3792.56,2027.5 C21.2@3790,2030.06 3790,2105 3812.5,2127.5 U5.12@3874.88,2127.5
NetC23_2: C23.2 J1.1 U5.1 | length 1185.5
  Top Layer w12: 4004.8,2639.8 4004.8,2699.04
  Top Layer w20: 4004.8,2639.8 3980,2615 3980,2080 4190,1870 4305,1870 4320,1885 C23.2@4320,1919.94 4312.44,1927.5 U5.1@4235.12,1927.5